# Altium PCB PCB1.PcbDoc (part 5 of 7)
Units mm, origin at the board's own origin, x right, y up, seen from the top; angles counter-clockwise.
Board outline 168 x 107.92 mm, 4 copper layers (Top Layer, POWER_LAYER, GND_LAYER, Bottom Layer), stack 1.182 mm thick; 507 components, 566 nets, 2495 pads, 1244 vias.
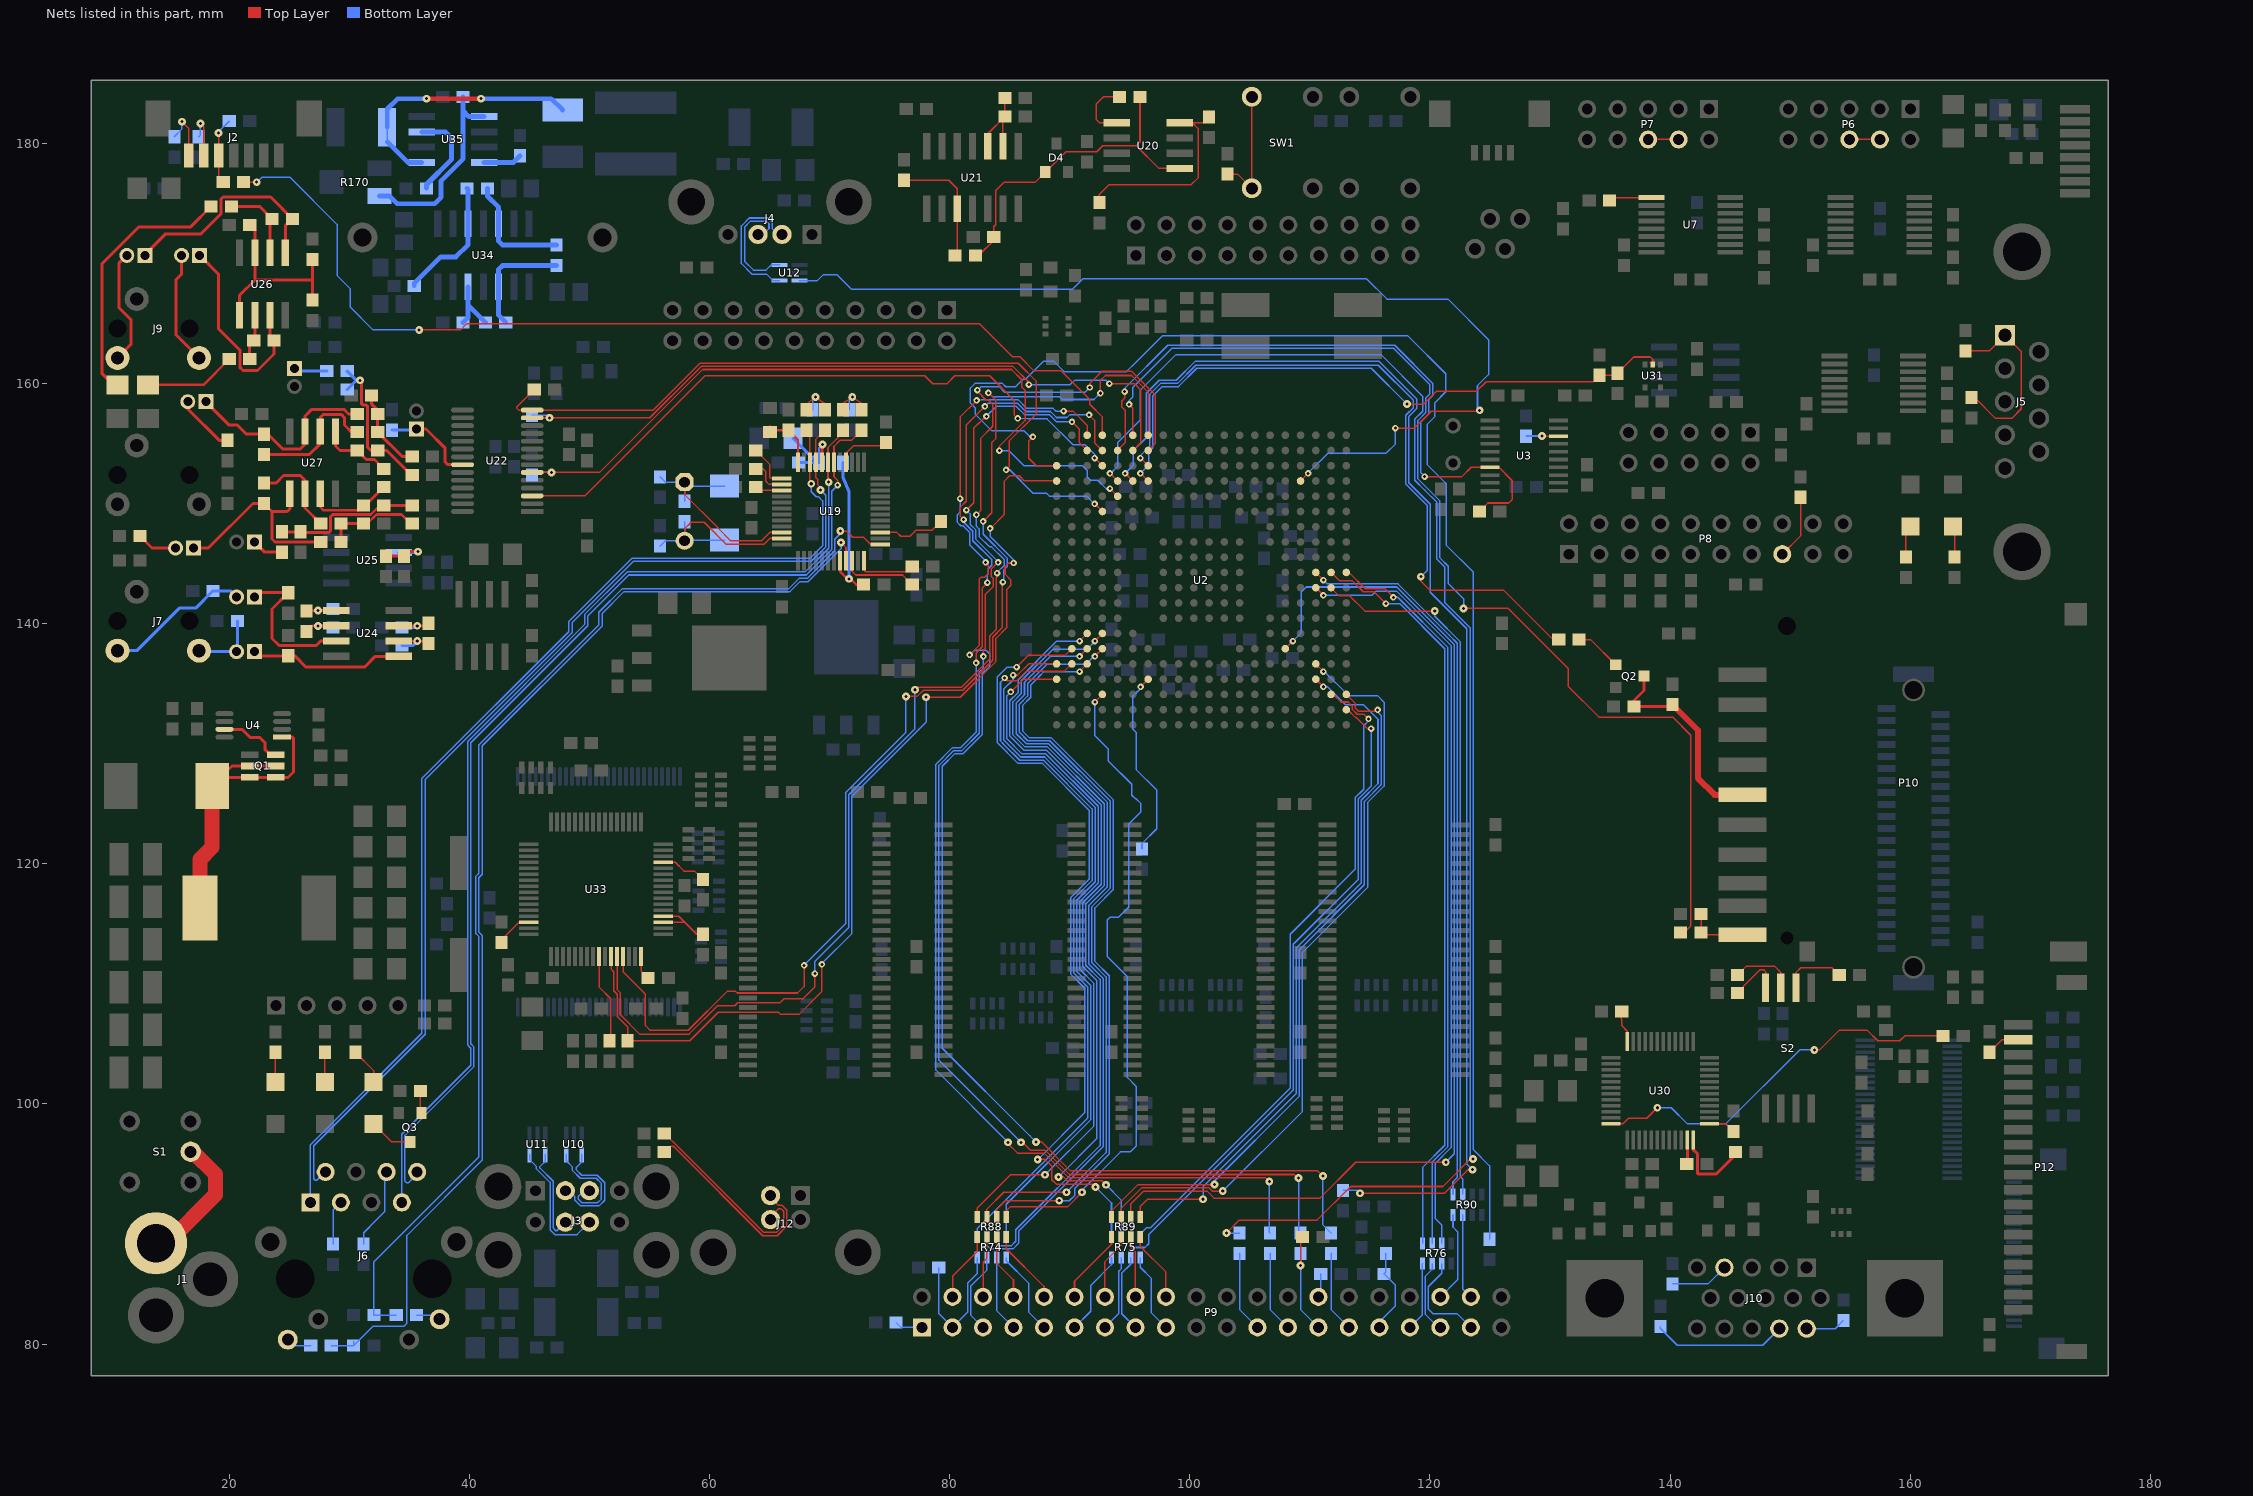
[diagram p7: the nets of this part, all layers, seen from the top]

## Via types
v1: diameter 0.54, hole 0.254, Top Layer to Bottom Layer, tented both sides, 504 vias
v2: diameter 0.65, hole 0.254, Top Layer to Bottom Layer, 387 vias
v3: diameter 0.65, hole 0.254, Top Layer to Bottom Layer, tented both sides, 325 vias
v4: diameter 0.54, hole 0.254, Top Layer to Bottom Layer, 25 vias
v5: diameter 1.27, hole 0.75, Top Layer to Bottom Layer, 2 vias
v6: diameter 0.65, hole 0.254, Top Layer to Bottom Layer, tented bottom, 1 vias

## Nets (pads, with @x,y where several pads share a name; then routed paths per layer and width w, separated by ;. In a path a pad name is that pad's centre, name@x,y a point inside that pad or via, vN(x,y) a via of type N, cw(c..) or ccw(c..) an arc to the next point about the centre after c; other vN are vias at no path point) (continued)
NetC130_2: C130.2 R47.2 U19.46 Y3.1 Y4.1 | length 18.3
  Top Layer w0.127: Y4.1@57.912,151.792 57.912,150.768 60.691,147.989 60.691,147.969 61.76,146.9 64.298,146.9 65,147.602 U19.46@66.004,147.602
  Bottom Layer w0.127: C130.2@55.88,152.234 56.322,151.792 Y4.1@57.912,151.792 ; R47.2@57.912,150.202 Y4.1@57.912,151.792 ; Y3.1@61.234,151.472 58.232,151.472 Y4.1@57.912,151.792
NetC132_2: C132.2 R47.1 U19.47 Y3.2 Y4.2 | length 17.4
  Top Layer w0.127: Y4.2@57.912,146.912 57.912,147.912 58.46,148.46 59.54,148.46 60.543,147.457 60.543,147.437 61.34,146.64 64.538,146.64 65,147.102 U19.47@66.004,147.102
  Bottom Layer w0.127: C132.2@55.88,146.47 56.322,146.912 Y4.2@57.912,146.912 ; R47.1@57.912,148.502 Y4.2@57.912,146.912 ; Y3.2@61.234,146.972 57.972,146.972 Y4.2@57.912,146.912
NetC134_2: C134.2 C137.2 L5.1 U19.32 | length 7.7
  Top Layer w0.127: v2@69.354,154.874 v2(69.4,154.92)
  Top Layer w0.25: U19.32@69.354,153.452 v2@69.354,154.874
  Bottom Layer w0.2: L5.1@69.104,153.416 69.104,154.624 v2(69.4,154.92)
  Bottom Layer w0.25: C134.2@66.932,155.448 L5.1@68.964,153.416 ; C137.2@67.398,153.416 L5.1@69.104,153.416
NetC135_2: C135.2 L5.2 U19.8 | length 13.1
  Top Layer w0.127: 70.854,144.346 U19.8@70.854,145.252 ; v2@71.469,143.731 v2@71.729,143.731 ; 72.204,143.256 C135.2@72.81,143.256
  Top Layer w0.2: 70.854,144.346 v2@71.469,143.732 ; v2@71.729,143.732 72.204,143.256
  Bottom Layer w0.25: L5.2@71.104,153.416 71.1,152.2 71.6,150.98 v2(71.6,143.74)
NetC136_2: C136.2 L4.1 U19.36 | length 4.7
  Top Layer w0.127: 65.024,156.48 L4.1@65.382,156.122
  Top Layer w0.2: L4.1@65.382,156.122 C136.2@66.548,156.122 67.354,155.316 U19.36@67.354,153.452
NetC139_2: C139.2 R52.1 R55.1 | length 4.2
  Top Layer w0.127: R52.1@71.12,157.822 71.12,158.36 v3(71.88,158.88) 72.644,158.356 R55.1@72.644,157.822
  Bottom Layer w0.127: C139.2@71.628,157.822 71.628,158.868 v3(71.88,158.88)
NetC140_2: C140.2 R53.2 R56.2 | length 4.1
  Top Layer w0.127: R53.2@68.072,157.822 68.072,158.312 v3(68.82,158.88) 69.596,158.324 R56.2@69.596,157.822
  Bottom Layer w0.127: C140.2@68.58,157.822 68.58,158.82 v3(68.82,158.88)
NetC141_2: C141.2 J6.6 | length 6.8
  Bottom Layer w0.127: C141.2@31.18,88.326 31.18,89.26 31.688,89.768 31.688,89.788 32.94,91.04 32.94,94.189 J6.6@33.085,94.334
NetC142_2: C142.2 J6.3 | length 3.7
  Bottom Layer w0.127: C142.2@28.64,88.326 28.64,91.159 J6.3@29.275,91.794
NetC143_1: C143.1 R84.1 U21.3 | length 10.3
  Top Layer w0.127: R84.1@76.2,176.95 79.91,176.95 80.618,176.242 80.618,170.876 C143.1@80.43,170.688
NetC143_2: C143.2 D4.1 R65.2 R78.2 U20.1 | length 28.1
  Top Layer w0.127: C143.2@82.13,170.688 82.408,170.688 83.654,171.934 83.654,173.074 83.82,173.24 83.82,176.08 84.5,176.76 87.094,176.76 D4.1@87.95,177.616 87.976,177.616 89.68,179.32 92.24,179.32 92.74,179.82 95.54,179.82 ; R78.2@95.846,183.896 95.846,180.126 95.54,179.82 ; U20.1@99.145,177.927 97.433,177.927 95.54,179.82
NetC144_2: C144.2 R87.1 U21.9 U21.10 | length 6.9
  Top Layer w0.127: U21.10@83.158,179.772 83.158,180.816 R87.1@84.594,182.252 C144.2@84.594,183.776 ; U21.9@84.428,179.772 R87.1@84.428,182.086
NetC145_2: C145.2 P10.4 Q2.3 R97.1 | length 17
  Top Layer w0.25: R97.1@136.994,133.096 140.042,133.096 C145.2@140.208,133.262 ; 136.994,133.604 137.827,134.437 Q2.3@137.827,135.636
  Top Layer w0.5: C145.2@140.208,133.262 142.32,131.15 142.32,127.14 143.713,125.747 P10.4@146.043,125.747
NetC147_1: C147.1 R104.2 U24.3 | length 13.1
  Top Layer w0.25: C147.1@22.086,142.24 22.428,142.582 R104.2@24.892,142.582 23.54,141.23 23.54,138.78 24.12,138.2 27.24,138.2 27.597,138.557 U24.3@28.896,138.557
NetC147_2: C147.2 J7.1 R100.1 | length 12.2
  Bottom Layer w0.25: J7.1@10.668,137.758 12.278,137.758 15.82,141.3 17.182,141.3 R100.1@18.63,142.748 20.078,142.748 C147.2@20.586,142.24
NetC148_1: C148.1 R105.1 U24.5 | length 12.9
  Top Layer w0.25: C148.1@22.086,137.668 22.428,137.326 25.434,137.326 26.38,136.38 31.24,136.38 32.147,137.287 U24.5@34.096,137.287
NetC148_2: C148.2 J7.2 R101.2 | length 5.7
  Bottom Layer w0.25: J7.2@17.468,137.758 17.558,137.668 C148.2@20.586,137.668 20.662,137.744 R101.2@20.662,140.208
NetC149_1: C149.1 R107.2 U24.2 | length 4
  Top Layer w0.2: C149.1@26.416,139.358 26.885,139.827 U24.2@28.896,139.827
  Bottom Layer w0.25: v2(27.38,139.82) 27.82,139.82 27.94,139.7 R107.2@28.614,139.7
NetC149_2: C149.2 R109.2 U24.1 | length 3.8
  Top Layer w0.2: C149.2@26.416,141.058 26.455,141.097 U24.1@28.896,141.097
  Bottom Layer w0.25: v2(27.36,141.1) 28.08,141.1 28.204,141.224 R109.2@28.614,141.224
NetC150_1: C150.1 R108.2 U24.6 | length 4
  Top Layer w0.2: U24.6@34.096,138.557 36.361,138.557 C150.1@36.576,138.342
  Bottom Layer w0.25: R108.2@34.378,138.176 35.259,138.176 v2(35.64,138.557)
NetC150_2: C150.2 R110.2 U24.7 | length 3.9
  Top Layer w0.2: U24.7@34.096,139.827 36.361,139.827 C150.2@36.576,140.042
  Bottom Layer w0.25: R110.2@34.378,139.7 35.513,139.7 v2(35.64,139.827)
NetC153_1: C153.1 C154.2 U25.2 | length 4.5
  Top Layer w0.25: C153.1@33.02,145.63 C154.2@34.544,145.63 34.914,146 v2(35.7,146)
  Bottom Layer w0.25: U25.2@34.096,145.923 35.623,145.923 v2(35.7,146)
NetC159_1: C159.1 C161.1 U22.22 | length 7.8
  Top Layer w0.25: C161.1@35.56,156.222 36.358,156.222 37.96,154.62 37.96,153.48 38.188,153.252 U22.22@39.412,153.252
  Bottom Layer w0.25: C159.1@33.528,156.122 35.46,156.122 C161.1@35.56,156.222
NetC163_1: C163.1 R115.2 | length 22
  Top Layer w0.2: C163.1@10.668,159.896 C163.1@10.736,159.896
  Top Layer w0.25: C163.1@10.668,159.896 10.324,159.896 9.36,160.86 9.36,169.96 12.46,173.06 16.762,173.06 R115.2@18.454,174.752
NetC164_1: C164.1 R116.2 | length 7.7
  Top Layer w0.2: C164.1@13.208,159.896 17.822,159.896 R116.2@19.978,162.052
NetC167_1: C167.1 R111.1 R120.2 R121.2 | length 8.1
  Top Layer w0.2: C167.1@31.154,148.336 31.476,148.336 32.24,149.1 32.275,149.1
  Top Layer w0.25: R120.2@29.298,146.812 R121.2@29.298,148.336 C167.1@31.154,148.336 ; 32.275,149.1 34.32,149.1 35.084,148.336 R111.1@35.218,148.336
NetC168_1: C168.1 R113.1 R123.2 R124.2 | length 7
  Top Layer w0.25: C168.1@31.838,159.004 31.838,158.295 32.346,157.787 R124.2@32.346,155.956 34.378,153.924 R113.1@35.218,153.924
NetC169_1: C169.1 R117.1 | length 2.7
  Top Layer w0.25: C169.1@22.086,146.812 22.936,145.962 R117.1@24.384,145.962
NetC170_1: C170.1 R118.1 | length 2.8
  Bottom Layer w0.25: C170.1@25.4,161.278 25.642,161.036 R118.1@28.106,161.036
NetC171_2: C171.2 R112.1 R117.2 R122.2 | length 12.5
  Top Layer w0.2: 31.73,149.08 31.758,149.08 32.538,149.86 R122.2@32.854,149.86
  Top Layer w0.25: R117.2@24.384,147.662 C171.2@25.908,147.662 25.99,147.58 28.26,147.58 28.42,147.74 28.42,148.92 28.588,149.088 31.73,149.088 ; R122.2@32.854,149.86 R112.1@35.218,149.86
NetC172_2: C172.2 R114.1 R118.2 R125.2 | length 13.1
  Top Layer w0.25: v2(30.86,160.28) 30.98,160.16 30.98,158.36 31.1,158.24 31.36,158.24 31.48,158.12 31.48,154.72 31.768,154.432 33.108,154.432 35.14,152.4 R114.1@35.218,152.4
  Bottom Layer w0.25: C172.2@29.806,159.512 30.574,160.28 v2(30.86,160.28) ; R118.2@29.806,161.036 v2@30.562,160.28
NetC174_1: C174.1 R121.1 U27.2 | length 8
  Top Layer w0.25: C174.1@22.86,151.726 23.886,151.726 24.5,152.34 25.9,152.34 26.289,151.951 26.289,149.645 R121.1@27.598,148.336
NetC174_2: C174.2 C179.1 R120.1 U27.1 | length 17.6
  Top Layer w0.25: C179.1@17.006,146.304 18.224,146.304 21.946,150.026 C174.2@22.86,150.026 23.54,149.346 ; U27.1@25.019,150.816 25.019,149.559 24.806,149.346 23.54,149.346 ; R120.1@27.598,146.812 23.788,146.812 23.54,147.06 23.54,149.346
NetC175_2: C175.2 R122.1 U27.3 | length 7.5
  Top Layer w0.2: U27.3@27.559,149.721 27.84,149.44 30.734,149.44 R122.1@31.154,149.86 R122.1@31.24,149.86 ; C175.2@32.764,151.384 C175.2@32.854,151.384
  Top Layer w0.25: U27.3@27.559,149.721 U27.3@27.559,150.816 ; R122.1@31.154,149.86 31.33,149.86 C175.2@32.854,151.384
NetC176_1: C176.1 R124.1 U27.6 | length 11.4
  Top Layer w0.25: C176.1@22.86,154.09 26.65,154.09 27.559,154.999 27.559,157.179 27.82,157.44 29.3,157.44 29.58,157.16 29.58,156.56 30.184,155.956 R124.1@30.646,155.956
NetC176_2: C176.2 C180.1 R123.1 U27.7 | length 22.3
  Top Layer w0.2: C176.2@22.86,155.79 23.21,155.79 24.46,154.54 25.88,154.54 26.289,154.949 U27.7@26.289,156.016
  Top Layer w0.25: C180.1@18.022,158.496 19.978,156.54 20.66,156.54 21.41,155.79 23.21,155.79 24.46,154.54 25.88,154.54 26.289,154.949 26.289,157.289 26.86,157.86 29.54,157.86 29.92,157.48 R123.1@30.646,157.48
NetC177_2: C177.2 R125.1 U27.5 | length 6
  Top Layer w0.25: U27.5@28.829,156.016 28.829,154.811 29.208,154.432 R125.1@30.646,154.432 31.398,153.68 32.082,153.68 C177.2@32.854,152.908
NetC178_2: C178.2 R126.2 R127.2 U26.3 U26.5 | length 16.4
  Top Layer w0.25: U26.5@20.84,165.69 20.84,167.36 22.12,168.64 26.924,168.64 ; R127.2@21.678,173.228 22.11,172.796 22.11,168.63 ; R126.2@26.924,166.966 C178.2@26.924,170.346
NetC179_2: C179.2 R129.2 | length 3.4
  Top Layer w0.25: R129.2@12.534,147.32 13.55,146.304 C179.2@15.506,146.304
NetC180_2: C180.2 R130.2 | length 5
  Top Layer w0.25: C180.2@16.522,158.496 16.522,157.898 19.138,155.282 R130.2@19.812,155.282
NetC181_1: C181.1 R128.1 U26.1 | length 18.9
  Top Layer w0.25: C181.1@12.942,170.688 12.942,170.742 14.68,172.48 17.62,172.48 19.28,174.14 19.28,175.36 19.46,175.54 23.43,175.54 R128.1@25.234,173.736 24.65,173.152 U26.1@24.65,170.89
NetC181_2: C181.2 J9.1 | length 9.7
  Top Layer w0.25: J9.1@10.668,162.142 11.78,163.254 11.78,165.34 10.78,166.34 10.78,170.026 C181.2@11.442,170.688
NetC182_1: C182.1 R119.2 U26.7 | length 17.6
  Top Layer w0.25: C182.1@17.514,170.688 19.1,169.102 19.1,164.56 20.86,162.8 20.86,161.36 21.12,161.1 22.34,161.1 23.71,162.47 R119.2@23.71,163.576 23.38,163.906 U26.7@23.38,165.69
NetC182_2: C182.2 J9.2 | length 9.5
  Top Layer w0.25: C182.2@16.014,170.688 16.014,169.134 15.54,168.66 15.54,164.07 J9.2@17.468,162.142
NetC201_2: C201.2 U30.36 | length 7
  Top Layer w0.25: U30.36@141.942,96.992 141.942,96.178 142.28,95.84 142.28,94.22 142.34,94.16 143.84,94.16 145.454,95.774 C201.2@145.454,96.012
NetC205_2: C205.2 U30.35 | length 2
  Top Layer w0.25: C205.2@141.39,94.996 141.442,95.048 U30.35@141.442,96.992
NetC224_2: C224.2 U35.3 | length 7.8
  Bottom Layer w0.4: U35.3@36.008,180.975 37.985,180.975 38.5,180.46 38.5,178.68 36.41,176.59 C224.2@36.41,176.276
NetD1_1: D1.1 R4.1 | length 2.6
  Top Layer w0.127: D1.1@163.576,148.11 163.716,147.97 R4.1@163.716,145.558
NetD2_1: D2.1 R6.1 | length 2.4
  Top Layer w0.127: R6.1@159.652,145.558 159.652,147.812 D2.1@159.772,147.932
NetD3_2: D3.2 L3.1 Q1.1 Q1.2 Q1.5 Q1.6 U4.1 | length 26.6
  Top Layer w0.25: D3.2@18.542,126.492 20.2,128.15 Q1.2@23.844,128.15 ; D3.2@19.25,127.2 24.88,127.2 25.32,127.64 25.32,130.48 25.244,130.556 U4.1@24.384,130.556
  Top Layer w1.27: L3.1@17.532,116.332 17.532,120.372 18.542,121.382 D3.2@18.542,126.492
NetD5_1: D5.1 R94.1 | length 2.5
  Top Layer w0.127: D5.1@23.828,101.822 R94.1@23.828,104.302
NetD6_1: D6.1 R96.1 | length 2.5
  Top Layer w0.127: D6.1@27.94,101.826 R96.1@27.94,104.306
NetD7_1: D7.1 R98.1 | length 3.1
  Top Layer w0.127: R98.1@30.48,104.306 32.004,102.782 D7.1@32.004,101.826
NetD7_2: D7.2 Q3.3 | length 3.7
  Top Layer w0.127: D7.2@32.004,98.326 33.486,96.844 Q3.3@35.052,96.844
NetD11_1: D11.1 L10.2 U35.1 | length 21.7
  Top Layer w0.4: v2(36.42,183.74) v2(40.94,183.74)
  Bottom Layer w0.127: L10.2@33.138,180.142 L10.2@33.138,181.356
  Bottom Layer w0.4: L10.2@33.138,180.142 34.845,178.435 U35.1@36.008,178.435 ; L10.2@33.138,181.356 33.138,182.878 34,183.74 v2(36.42,183.74) ; v2(40.94,183.74) 46.8,183.74 47.742,182.798 D11.1@47.752,182.798
NetJ1_1: J1.1 S1.2 | length 11.2
  Top Layer w1.27: J1.1@13.876,88.392 14.792,88.392 18.84,92.44 18.84,94.14 16.968,96.012 S1.2@16.764,96.012
NetJ2_5: J2.5 R28.1 R33.1 | length 6.4
  Top Layer w0.127: v3(19.092,180.88) 19.092,176.406 R28.1@19.47,176.784
  Bottom Layer w0.127: v3(19.092,180.88) 19.092,180.978 R33.1@19.978,181.864
NetJ2_6: J2.6 R29.1 | length 3.9
  Top Layer w0.127: v3(17.58,181.66) 17.842,181.418 J2.6@17.842,178.988
  Bottom Layer w0.127: R29.1@17.432,180.562 17.58,180.71 v3(17.58,181.66)
NetJ2_7: J2.7 R30.1 | length 4.6
  Top Layer w0.127: v3(16.04,181.82) 16.592,181.268 J2.7@16.592,178.988
  Bottom Layer w0.127: R30.1@15.4,180.562 16.04,181.202 v3(16.04,181.82)
NetJ3_2: J3.2 U10.4 | length 9.9
  Bottom Layer w0.127: J3.2@47.976,92.77 48.29,92.77 48.766,92.294 48.766,91.98 48.78,91.98 49.26,91.5 50.78,91.5 51.26,91.98 51.26,93.439 51.22,93.479 50.64,94.06 49.34,94.06 48.9,94.5 48.9,94.72 49.342,95.162 U10.4@49.342,95.797
NetJ3_3: J3.3 U10.5 | length 9.2
  Bottom Layer w0.127: U10.5@48.042,95.797 48.042,95.258 48.56,94.74 48.56,94.46 49.22,93.8 50.54,93.8 50.98,93.36 50.98,92.08 50.66,91.76 49.36,91.76 49.06,92.06 49.06,92.3 49.53,92.77 J3.3@49.976,92.77
NetJ3_6: J3.6 U11.4 | length 8.2
  Bottom Layer w0.127: U11.4@46.294,95.797 46.294,95.214 45.86,94.78 45.86,94.66 46.96,93.56 46.96,89.66 47.18,89.44 47.266,89.44 J3.6@47.976,90.15
NetJ3_7: J3.7 U11.5 | length 10.9
  Bottom Layer w0.127: U11.5@44.994,95.797 44.994,95.366 45.54,94.82 45.54,94.62 46.706,93.454 46.706,89.514 47.1,89.12 48.946,89.12 J3.7@49.976,90.15
NetJ4_2: J4.2 U12.4 | length 11.4
  Bottom Layer w0.127: U12.4@65.825,168.59 65.27,168.59 64.73,169.13 63.51,169.13 62.64,170 62.64,173.14 63.3,173.8 64.82,173.8 65.2,173.42 65.2,172.92 65.69,172.43 J4.2@66.024,172.43
NetJ4_3: J4.3 U12.5 | length 10.1
  Bottom Layer w0.127: J4.3@64.024,172.43 64.45,172.43 64.94,172.92 64.94,173.32 64.72,173.54 63.4,173.54 62.92,173.06 62.92,170.18 63.64,169.46 64.7,169.46 65.13,169.89 U12.5@65.825,169.89
NetJ5_1: J5.1 R43.1 R44.1 | length 15.8
  Top Layer w0.127: R43.1@164.592,162.726 166.586,162.726 J5.1@167.896,164.036 169.26,162.672 169.26,157.9 168.46,157.1 167.12,157.1 165.382,158.838 R44.1@165.1,158.838
NetJ6_1: J6.1 R53.1 U19.34 | length 91.6
  Top Layer w0.127: R53.1@68.072,156.122 68.354,155.84 68.354,151.766 v3(68.46,151.66) v3@68.7,151.66
  Bottom Layer w0.127: J6.1@26.735,91.794 26.735,96.595 36.019,105.879 36.019,127.097 48.26,139.337 48.26,140.18 53.534,145.454 68.356,145.454 69.404,146.502 69.404,150.236 69.06,150.58 68.88,150.58 68.46,151 v3(68.46,151.66)
NetJ6_2: J6.2 R56.1 U19.33 | length 90.7
  Top Layer w0.127: v3(69.22,151.14) 69.22,151.36 69.02,151.56 69.02,152 68.854,152.166 68.854,155.38 R56.1@69.596,156.122
  Bottom Layer w0.127: J6.2@28.005,94.334 27.954,94.334 27.26,93.64 27.14,93.64 27.02,93.76 27.02,96.52 36.3,105.8 36.3,127.018 48.54,139.258 48.54,140.08 53.66,145.2 68.462,145.2 69.658,146.396 69.658,150.702 v3(69.22,151.14)
NetJ6_7: J6.7 R52.2 U19.31 | length 88.6
  Top Layer w0.127: v3(69.912,151.792) 69.854,151.85 69.854,154.676 71.12,155.942 R52.2@71.12,156.122
  Bottom Layer w0.127: J6.7@34.355,91.794 34.355,97.474 40.1,103.219 40.1,104.64 39.84,104.9 39.84,130.199 49.58,139.939 49.58,140.76 53.134,144.314 67.935,144.314 69.912,146.291 v3(69.912,151.792) v3@69.98,151.86
NetJ6_8: J6.8 R55.2 U19.30 | length 89.6
  Top Layer w0.127: v1(70.66,151.54) 70.66,151.94 70.354,152.246 70.354,154.774 70.88,155.3 71.84,155.3 72.058,155.518 72.058,155.536 R55.2@72.644,156.122 ; 71.782,155.26 71.822,155.3
  Bottom Layer w0.127: J6.8@35.625,94.334 35.625,94.145 34.92,93.44 34.735,93.44 34.609,93.566 34.609,97.369 40.36,103.12 40.36,104.739 40.094,105.005 40.094,130.094 49.84,139.84 49.84,140.64 53.26,144.06 68.04,144.06 70.166,146.186 70.166,151.046 v1(70.66,151.54)
NetJ6_9: J6.9 R59.2 | length 2.1
  Bottom Layer w0.127: J6.9@24.855,80.364 25.363,79.856 R59.2@26.774,79.856
NetJ6_12: J6.12 R60.2 | length 2.1
  Bottom Layer w0.127: R60.2@35.586,82.396 37.174,82.396 J6.12@37.505,82.066
NetJ10_4: J10.4 R133.2 | length 4.9
  Bottom Layer w0.127: R133.2@140.208,85.002 143.168,85.002 J10.4@144.526,86.36
NetJ10_11: J10.11 R135.2 | length 3.3
  Bottom Layer w0.127: J10.11@151.384,81.28 153.758,81.28 R135.2@154.432,81.954
NetJ10_12: J10.12 R134.2 | length 11.2
  Bottom Layer w0.127: R134.2@139.192,81.446 139.192,81.308 140.6,79.9 147.718,79.9 J10.12@149.098,81.28
NetJ12_2: J12.2 R161.1 | length 16.4
  Top Layer w0.127: R161.1@56.72,96.42 56.78,96.48 56.96,96.48 57.184,96.256 64.42,89.02 65.62,89.02 66.42,89.82 66.42,91.16 66.04,91.54 65.74,91.54 65.07,92.21 J12.2@65.07,92.36
NetJ12_3: J12.3 R162.1 | length 16.4
  Top Layer w0.127: R162.1@56.222,97.536 56.244,97.536 56.91,96.87 56.93,96.87 57.279,96.52 64.499,89.3 65.54,89.3 66.16,89.92 66.16,91.06 65.94,91.28 65.76,91.28 65.07,90.59 J12.3@65.07,90.36
NetP6_4: P6.4 P6.6 | length 2.5
  Top Layer w0.127: P6.6@154.94,180.34 P6.4@157.48,180.34
NetP7_4: P7.4 P7.6 | length 2.5
  Top Layer w0.127: P7.6@138.176,180.34 P7.4@140.716,180.34
NetP8_15: P8.15 R40.1 | length 5.4
  Top Layer w0.127: P8.15@149.352,145.796 150.876,147.32 R40.1@150.876,150.534
NetP9_1: P9.1 R82.1 | length 2.3
  Bottom Layer w0.127: R82.1@75.526,81.788 75.93,81.384 P9.1@77.688,81.384
NetP9_3: P9.3 R74.8 R83.1 | length 12.1
  Bottom Layer w0.127: R83.1@79.082,86.36 79.082,82.53 P9.3@80.228,81.384 81.48,82.636 81.48,85.06 82.296,85.876 R74.8@82.296,87.2
NetP9_4: P9.4 R88.1 | length 5.8
  Top Layer w0.127: P9.4@80.228,83.924 80.228,85.648 82.296,87.716 R88.1@82.296,88.9
NetP9_5: P9.5 R74.7 | length 6.8
  Bottom Layer w0.127: P9.5@82.768,81.384 81.734,82.418 81.734,84.814 83.096,86.176 R74.7@83.096,87.2
NetP9_6: P9.6 R88.2 | length 5.1
  Top Layer w0.127: P9.6@82.768,83.924 82.768,86.808 83.096,87.136 R88.2@83.096,88.9
NetP9_7: P9.7 R74.6 | length 6.4
  Bottom Layer w0.127: R74.6@83.896,87.2 83.896,82.796 P9.7@85.308,81.384
NetP9_8: P9.8 R88.3 | length 5.6
  Top Layer w0.127: R88.3@83.896,88.9 83.896,86.744 85.308,85.332 P9.8@85.308,83.924
NetP9_9: P9.9 R74.5 | length 7.1
  Bottom Layer w0.127: R74.5@84.696,87.2 84.696,86.944 86.56,85.08 86.56,82.672 P9.9@87.848,81.384
NetP9_10: P9.10 R88.4 | length 6.3
  Top Layer w0.127: R88.4@84.696,88.9 84.696,87.944 87.848,84.792 P9.10@87.848,83.924
NetP9_11: P9.11 R75.8 | length 7.1
  Bottom Layer w0.127: P9.11@90.388,81.384 91.74,82.736 91.74,84.88 93.472,86.612 R75.8@93.472,87.2
NetP9_12: P9.12 R89.1 | length 6.3
  Top Layer w0.127: P9.12@90.388,83.924 90.388,85.228 93.472,88.312 R89.1@93.472,88.9
NetP9_13: P9.13 R75.7 | length 6.4
  Bottom Layer w0.127: P9.13@92.928,81.384 94.08,82.536 94.08,86.06 94.272,86.252 R75.7@94.272,87.2
NetP9_14: P9.14 R89.2 | length 5.5
  Top Layer w0.127: P9.14@92.928,83.924 92.928,86.868 94.272,88.212 R89.2@94.272,88.9
NetP9_15: P9.15 R75.6 | length 6.6
  Bottom Layer w0.127: R75.6@95.072,87.2 95.072,86.652 94.334,85.914 94.334,82.518 P9.15@95.468,81.384
NetP9_16: P9.16 R89.3 | length 5.1
  Top Layer w0.127: R89.3@95.072,88.9 95.072,88.108 95.468,87.712 P9.16@95.468,83.924
NetP9_17: P9.17 R75.5 | length 6.7
  Bottom Layer w0.127: R75.5@95.872,87.2 95.872,86.388 96.8,85.46 96.8,82.592 P9.17@98.008,81.384
NetP9_18: P9.18 R89.4 | length 5.9
  Top Layer w0.127: R89.4@95.872,88.9 95.872,88.128 98.008,85.992 P9.18@98.008,83.924
NetP9_23: P9.23 R67.2 | length 6.8
  Bottom Layer w0.127: R67.2@104.14,87.542 104.14,82.872 P9.23@105.628,81.384
NetP9_25: P9.25 R68.2 | length 6.8
  Bottom Layer w0.127: R68.2@106.68,87.542 106.68,82.872 P9.25@108.168,81.384
NetP9_27: P9.27 R69.2 R77.1 | length 9.2
  Top Layer w0.127: v3(109.22,86.54) 109.22,88.734 R77.1@109.386,88.9
  Bottom Layer w0.127: R69.2@109.22,87.542 109.22,82.872 P9.27@110.708,81.384
NetP9_28: P9.28 R85.2 | length 2
  Bottom Layer w0.127: P9.28@110.708,83.924 110.91,84.126 R85.2@110.91,85.852
NetP9_29: P9.29 R70.2 | length 6.8
  Bottom Layer w0.127: R70.2@111.76,87.542 111.76,82.872 P9.29@113.248,81.384
NetP9_31: P9.31 R71.2 R81.2 | length 7.2
  Bottom Layer w0.127: P9.31@115.788,81.384 115.788,81.848 117.1,83.16 117.1,84.918 R81.2@116.166,85.852 116.332,86.018 R71.2@116.332,87.542
NetP9_33: P9.33 R76.8 | length 5.7
  Bottom Layer w0.127: P9.33@118.328,81.384 119.34,82.396 119.34,86.652 R76.8@119.38,86.692
NetP9_35: P9.35 R76.7 | length 6.2
  Bottom Layer w0.127: R76.7@120.18,86.692 120.18,86.2 119.594,85.614 119.594,82.506 120.716,81.384 P9.35@120.868,81.384
NetP9_36: P9.36 R90.8 | length 7.6
  Bottom Layer w0.127: P9.36@120.868,83.924 122.3,85.356 122.3,89.36 121.92,89.74 R90.8@121.92,90.756
NetP9_37: P9.37 R76.6 | length 8.4
  Bottom Layer w0.127: R76.6@120.98,86.692 120.98,85.9 119.848,84.768 119.848,82.926 120.234,82.54 122.252,82.54 P9.37@123.408,81.384
NetP9_38: P9.38 R90.7 | length 7.1
  Bottom Layer w0.127: R90.7@122.72,90.756 122.72,84.612 P9.38@123.408,83.924
NetP10_10: P10.10 R92.1 R95.2 | length 5.1
  Top Layer w0.127: R95.2@142.582,115.824 R92.1@142.582,114.3 142.785,114.097 P10.10@146.043,114.097
NetP12_19: P12.19 R136.1 | length 2.8
  Top Layer w0.127: R136.1@166.624,104.306 167.678,105.36 P12.19@169.013,105.36
NetQ1_3: Q1.3 U4.7 | length 5.5
  Top Layer w0.25: U4.7@19.584,131.206 21.034,131.206 21.72,130.52 22.52,130.52 22.94,130.1 22.94,129.54 23.38,129.1 Q1.3@23.844,129.1
NetQ2_1: Q2.1 R91.1 | length 3.9
  Top Layer w0.127: R91.1@132.422,138.684 133.379,138.684 Q2.1@135.477,136.586
NetQ3_1: Q3.1 R99.1 | length 1.9
  Top Layer w0.127: R99.1@35.902,101.092 35.902,99.344 Q3.1@36.002,99.244
NetR5_1: R5.1 U2.G4 | length 16
  Top Layer w0.127: v1(95.89,134.744) 95.89,134.752 U2.G4@96.52,135.382
  Bottom Layer w0.127: v1(95.89,134.744) 95.89,134.59 95.669,134.369 95.649,134.369 95.26,133.98 95.26,131.22 95.52,130.96 95.52,127.86 97.24,126.14 97.24,122.92 96.012,121.692 R5.1@96.012,121.246
NetR12_2: R12.2 U2.E19 U3.7 | length 55.2
  Top Layer w0.127: U2.E19@93.98,154.432 93.98,154.46 94.62,155.1 94.62,157.76 94.32,158.06 94.32,158.54 94.56,158.78 v1(94.56,159.34) ; v1(119.56,152.26) 122.66,152.26 123.432,153.032 125.748,153.032 126.86,151.92 126.86,150.36 126.559,150.059 124.825,150.059 R12.2@124.118,149.352
  Bottom Layer w0.127: v1(94.56,159.34) 94.56,159.6 98.16,163.2 117.06,163.2 120.24,160.02 120.24,159.04 119.908,158.708 119.908,157.48 119.25,156.822 119.25,152.57 v1(119.56,152.26)
NetR13_1: R13.1 U3.18 | length 2.7
  Top Layer w0.127: v3(129.34,155.64) U3.18@130.708,155.632
  Bottom Layer w0.127: R13.1@128.016,155.614 128.042,155.64 v3(129.34,155.64)
NetR28_2: R28.2 U2.D20 | length 85.6
  Top Layer w0.127: R28.2@21.17,176.784 v3(22.26,176.78) ; v3(35.8,164.48) 39.24,164.48 39.76,165 82.46,165 85.2,162.26 85.82,162.26 87.02,161.06 89.28,161.06 91.66,158.68 91.66,158.28 92.71,157.23 U2.D20@92.71,155.702
  Bottom Layer w0.127: v3(22.26,176.78) 22.726,177.206 25.015,177.206 28.96,173.261 28.96,169.001 30.074,167.887 30.074,166.366 31.96,164.48 v3(35.8,164.48)
NetR35_1: R35.1 U7.9 | length 3.6
  Top Layer w0.127: R35.1@134.962,175.26 135.205,175.503 U7.9@138.457,175.503
NetR48_2: R48.2 U19.37 | length 3.8
  Top Layer w0.127: R48.2@63.842,154.432 65.02,153.254 65.02,152.18 65.098,152.102 U19.37@66.004,152.102
NetR49_2: R49.2 U19.38 | length 3.2
  Top Layer w0.127: R49.2@63.842,152.908 64.432,152.908 64.66,152.68 64.66,151.88 64.938,151.602 U19.38@66.004,151.602
NetR50_2: R50.2 U19.39 | length 2.3
  Top Layer w0.127: R50.2@63.842,151.384 64.124,151.102 U19.39@66.004,151.102
NetR51_1: R51.1 U19.28 | length 4.5
  Top Layer w0.127: U19.28@71.354,153.452 71.354,154.2 71.974,154.82 74.36,154.82 R51.1@74.676,155.136
NetR54_1: R54.1 U19.10 | length 6.6
  Top Layer w0.127: U19.10@71.854,145.252 71.854,144.366 72.16,144.06 76.06,144.06 R54.1@77.02,143.1
NetR57_1: R57.1 U19.12 | length 5.4
  Top Layer w0.127: U19.12@72.854,145.252 72.854,144.446 72.986,144.314 R57.1@77.424,144.314
NetR58_1: R58.1 U19.15 | length 5.7
  Top Layer w0.127: U19.15@74.204,147.602 75.598,147.602 75.907,147.293 76.693,147.293 77.2,147.8 78.536,147.8 R58.1@79.248,148.512
NetR59_1: R59.1 R61.1 U19.9 | length 97.9
  Top Layer w0.127: v3(70.94,146.76) 71.354,146.346 U19.9@71.354,145.252
  Bottom Layer w0.127: R59.1@28.474,79.856 R61.1@30.33,79.856 ; R61.1@30.33,80.23 R61.1@30.33,79.856 ; v3(70.94,146.76) 70.94,146.24 68.208,143.508 67.528,143.508 66.7,142.68 52.86,142.68 51.04,140.86 51.04,139.82 41.06,129.84 41.06,119.14 40.754,118.834 40.754,114.325 41.06,114.019 41.06,95.32 34.78,89.04 34.78,81.72 34.54,81.48 31.954,81.48 R61.1@30.33,79.856
NetR60_1: R60.1 R62.1 U19.13 | length 95.8
  Top Layer w0.127: v3(70.88,147.72) 71.4,147.72 71.92,147.2 72.82,147.2 73.418,146.602 U19.13@74.204,146.602
  Bottom Layer w0.127: R60.1@33.886,82.396 R62.1@32.03,82.396 32.03,86.85 40.78,95.6 40.78,113.94 40.5,114.22 40.5,118.94 40.78,119.22 40.78,129.919 50.76,139.899 50.76,140.96 52.734,142.934 66.595,142.934 67.441,143.78 68.121,143.78 70.42,146.079 70.42,147.04 70.88,147.5 v3(70.88,147.72)
NetR63_1: R63.1 R64.2 U20.4 | length 16.9
  Top Layer w0.127: R63.1@92.456,175.094 92.456,175.756 93.28,176.58 100.12,176.58 100.68,177.14 100.68,181.26 U20.4@100.203,181.737 ; U20.4@99.145,181.737 101.131,181.737 R64.2@101.6,182.206
NetR66_1: R66.1 U2.F17 | length 111.6
  Top Layer w0.127: v1(94.61,152.53) 95.248,151.892 U2.F17@95.25,151.892 ; v3(114.18,92.56) 121.2,92.56 123.16,94.52 v3(123.54,94.52)
  Bottom Layer w0.127: v1(94.61,152.53) 95.28,153.2 95.28,154.42 96.36,155.5 96.36,159.2 97.44,160.28 98.862,160.28 100.462,161.88 115.74,161.88 118.88,158.74 118.88,157.901 118.234,157.255 118.234,151.745 120.02,149.959 120.02,142.619 123.06,139.579 123.06,95 v3(123.54,94.52) ; R66.1@112.776,92.798 113.942,92.798 v3(114.18,92.56)
NetR67_1: R67.1 U2.E17 | length 125.1
  Top Layer w0.127: v1(93.34,152.53) 93.978,151.892 U2.E17@93.98,151.892 ; v3(103.04,89.24) 104.12,90.32 110.6,90.32 113.4,93.12 121.08,93.12 123.36,95.4 v3(123.58,95.4)
  Bottom Layer w0.127: v1(93.34,152.53) 93.41,152.53 93.98,153.1 93.98,155.08 95.852,156.952 95.852,159.432 98.84,162.42 115.92,162.42 119.4,158.94 119.4,157.702 118.742,157.044 118.742,151.956 119.589,151.108 120.577,150.121 120.577,145.381 121.224,144.734 121.224,141.775 123.34,139.658 123.34,95.64 v3(123.58,95.4) ; v3(103.04,89.24) 103.042,89.242 R67.1@104.14,89.242
NetR68_1: R68.1 U2.D19 | length 108.4
  Top Layer w0.127: v1(81.16,148.68) 80.86,148.98 80.86,149.68 81.38,150.2 81.38,156.56 v1(82.92,158.1) ; v1(82.2,136.74) 82.2,137.581 82.7,138.081 82.7,142.98 v1(83.14,143.42) ; v3(84.86,96.8) 84.86,96.68 85.64,95.9 87.841,95.9 89.881,93.86 106.3,93.86 v3(106.62,93.54) ; v1(91.6,157.4) 92.06,156.94 ; 92.08,156.94 92.08,155.06 92.708,154.432 U2.D19@92.71,154.432
  Bottom Layer w0.127: v1(81.16,148.68) 81.16,148.459 81.92,147.699 81.92,146.92 83.5,145.34 83.5,144.88 83.2,144.58 83.2,144.16 83.14,144.1 v1(83.14,143.42) ; v1(82.2,136.74) 82.2,130.98 80.908,129.688 80.228,129.688 78.84,128.3 78.84,102.82 v3(84.86,96.8) ; v1(82.92,158.1) 83.2,158.38 85.62,158.38 86.32,157.68 88.379,157.68 88.879,157.18 89.76,157.18 89.98,157.4 v1(91.6,157.4) ; v3(106.62,93.54) 106.62,89.302 R68.1@106.68,89.242
NetR69_1: R69.1 U2.C19 | length 107.6
  Top Layer w0.127: v1(81.38,149.46) 82,150.08 82,156.3 v1(83.04,157.28) ; v1(82.8,137.28) 82.8,137.822 82.96,137.982 82.96,142.44 83.62,143.1 83.62,143.78 83.46,143.94 83.46,144.56 v1(84.02,145.12) ; v3(85.94,96.8) 86.06,96.8 86.7,96.16 87.94,96.16 89.98,94.12 108.7,94.12 v3(109.06,93.82) ; v1(90.18,156.82) 90.8,156.2 90.8,155.08 91.44,154.44 U2.C19@91.44,154.432
  Bottom Layer w0.127: v1(81.38,149.46) 81.694,149.146 81.694,148.285 82.18,147.799 82.18,147.019 84.02,145.179 v1(84.02,145.12) ; v1(82.8,137.28) 82.8,136.32 82.454,135.974 82.454,130.875 81.013,129.434 80.334,129.434 79.1,128.2 79.1,103.64 v3(85.94,96.8) ; v1(83.04,157.28) 83.88,158.12 85.52,158.12 86.22,157.42 88.28,157.42 88.88,156.82 v1(90.18,156.82) ; v3(109.06,93.82) 109.06,89.402 R69.1@109.22,89.242
NetR70_1: R70.1 U2.C20 | length 112.7
  Top Layer w0.127: v1(80.86,150.42) 80.86,157.22 v1(82.24,158.6) ; v1(81.66,137.4) 82.44,138.18 82.44,143.72 82.6,143.88 82.9,143.88 83.2,144.18 83.2,144.9 v1(82.98,145.12) ; v3(87.18,96.84) 87.631,96.84 90.051,94.42 110.66,94.42 v3(111.08,94) ; v1(89.48,157.72) 90.26,157.72 91.44,156.54 U2.C20@91.44,155.702
  Bottom Layer w0.127: v1(80.86,150.42) 80.86,149.3 80.633,149.073 80.633,148.44 80.904,148.169 81.09,148.169 81.66,147.599 81.66,146.56 82.98,145.24 v1(82.98,145.12) ; v1(81.66,137.4) 82.06,137.8 83.02,137.8 83.32,137.5 83.32,136.446 82.708,135.834 82.708,130.769 81.119,129.18 80.44,129.18 79.38,128.12 79.38,104.64 86.693,97.327 v3(87.18,96.84) ; v1(82.24,158.6) 82.62,158.64 85.719,158.64 86.419,157.94 88.6,157.94 88.82,157.72 v1(89.48,157.72) ; v3(111.08,94) 111.08,89.922 R70.1@111.76,89.242
NetR72_1: R72.1 U2.A18 | length 131
  Top Layer w0.127: v1(86.92,155.56) 86.58,155.22 86.58,153.78 87.198,153.162 U2.A18@88.9,153.162
  Bottom Layer w0.127: v1(86.92,155.56) 86.7,155.56 86.2,156.06 83.523,156.06 82.111,157.473 82.111,157.989 81.72,158.38 81.72,159.64 82.1,160.02 84.38,160.02 84.66,159.74 85.48,159.74 86.1,160.36 86.311,160.36 87.831,161.88 88.633,161.88 89.506,161.007 94.729,161.007 95.489,161.768 97.702,163.98 118.16,163.98 121.32,160.82 121.32,159.318 120.416,158.414 120.416,157.266 119.758,156.608 119.758,153.261 121.339,151.68 121.339,146.561 123.6,144.3 123.6,96.2 124.968,94.832 R72.1@124.968,88.734
NetR74_1: R74.1 U2.B5 | length 62.3
  Top Layer w0.127: v1(84.56,135.48) 84.78,135.24 85.56,135.24 86.38,136.06 89.56,136.06 90.152,136.652 U2.B5@90.17,136.652
  Bottom Layer w0.127: R74.1@82.296,88.9 82.296,89.616 91.5,98.82 91.5,109.745 90.314,110.931 90.314,117.066 91.858,118.61 91.858,124.578 87.816,128.62 85.82,128.62 84.459,129.981 84.459,130.003 84.224,130.237 84.224,135.124 v1(84.56,135.48)
NetR74_2: R74.2 U2.C6 | length 65.3
  Top Layer w0.127: v1(90.81,137.284) 90.81,137.292 U2.C6@91.44,137.922
  Bottom Layer w0.127: R74.2@83.096,88.9 83.096,88.204 83.38,87.92 85.26,87.92 85.754,88.414 85.754,89.414 92.77,96.43 92.77,110.47 91.584,111.656 91.584,116.54 93.128,118.084 93.128,125.104 88.232,130 86.38,130 85.536,130.844 85.536,133.393 86.223,134.08 86.223,135.123 88.384,137.284 v1(90.81,137.284)
NetR74_3: R74.3 U2.D7 | length 66
  Top Layer w0.127: v1@92.08,138.562 U2.D7@92.71,139.192
  Bottom Layer w0.127: R74.3@83.896,88.9 83.896,88.324 84.02,88.2 85.14,88.2 85.5,88.56 85.5,89.52 92.516,96.536 92.516,110.365 91.33,111.551 91.33,116.645 92.874,118.189 92.874,124.998 88.132,129.74 86.26,129.74 85.264,130.736 85.264,133.48 85.962,134.178 85.962,135.243 88.579,137.86 91.42,137.86 92.08,138.52 v1(92.08,138.554)
NetR74_4: R74.4 U2.A5 | length 59.5
  Top Layer w0.127: v1(85.28,135.72) 85.64,135.72 86.572,136.652 U2.A5@88.9,136.652
  Bottom Layer w0.127: R74.4@84.696,88.9 84.696,91.636 91.754,98.694 91.754,109.85 90.568,111.036 90.568,116.961 92.112,118.505 92.112,124.683 87.895,128.9 85.92,128.9 84.775,130.045 84.48,130.341 84.48,134.56 84.5,134.56 85.28,135.34 v1(85.28,135.72)
NetR75_1: R75.1 U2.B6 | length 65.7
  Top Layer w0.127: v1(85.56,136.38) 86.54,137.36 89.6,137.36 90.162,137.922 U2.B6@90.17,137.922 ; v3(87.32,95.38) 87.94,95.38 88.5,94.82 88.5,93.68 88.86,93.32 91.9,93.32 v3(92.14,93.08)
  Bottom Layer w0.127: v1(85.56,136.38) 84.76,136.38 83.968,135.588 83.968,130.078 85.68,128.366 85.68,128.36 87.716,128.36 91.604,124.472 91.604,118.715 90.06,117.171 90.06,110.826 91.246,109.64 91.246,99.286 87.34,95.38 v3(87.32,95.38) ; v3(92.14,93.08) 93.472,91.748 R75.1@93.472,88.9
NetR75_2: R75.2 U2.C7 | length 64.9
  Top Layer w0.127: v3(89.06,93.92) 89.462,93.92 89.782,93.6 92.68,93.6 v3(93.02,93.26) ; v1(90.81,138.554) 90.81,138.562 U2.C7@91.44,139.192
  Bottom Layer w0.127: v3(89.06,93.92) 92.262,97.142 92.262,110.26 91.076,111.446 91.076,116.751 92.62,118.295 92.62,124.893 88.07,129.443 86.197,129.443 85.002,130.638 85.002,133.577 85.7,134.275 85.7,135.34 88.914,138.554 v1(90.81,138.554) ; v3(93.02,93.26) 94.272,91.988 R75.2@94.272,88.9
NetR75_3: R75.3 U2.Y2 | length 55.7
  Top Layer w0.127: U2.Y2@113.03,132.842 113.158,132.842 113.8,132.2 113.86,132.2 114.8,131.26 v1(115.1,131.26)
  Bottom Layer w0.127: R75.3@95.072,88.9 95.072,88.248 95.28,88.04 96.26,88.04 96.58,88.36 96.58,89.12 108.614,101.154 108.614,113.294 114.02,118.7 114.02,125.397 115.1,126.477 v1(115.1,131.26)
NetR75_4: R75.4 U2.W3 | length 55.4
  Top Layer w0.127: U2.W3@111.76,134.112 111.948,134.112 112.58,133.48 113.18,133.48 113.54,133.12 113.54,132.86 113.946,132.454 114.506,132.454 v1(114.88,132.08)
  Bottom Layer w0.127: R75.4@95.872,88.9 95.872,89.172 96.38,89.68 96.72,89.68 108.36,101.32 108.36,114.14 113.76,119.54 113.76,125.496 114.48,126.216 114.48,131.5 114.88,131.9 v1(114.88,132.08)
NetR76_1: R76.1 U2.W11 | length 62.4
  Top Layer w0.127: U2.W11@111.76,144.272 111.768,144.272 112.44,143.6 113.5,143.6 114.44,142.66 115.34,142.66 v1(116.32,141.68)
  Bottom Layer w0.127: v1(116.32,141.68) 117.48,141.68 121.24,137.92 121.24,96.56 119.38,94.7 R76.1@119.38,88.392
NetR76_2: R76.2 U2.Y11 | length 61.2
  Top Layer w0.127: U2.Y11@113.03,144.272 113.248,144.272 114.606,142.914 116.246,142.914 v1(116.96,142.2)
  Bottom Layer w0.127: v1(116.96,142.2) 117.32,142.2 121.5,138.02 121.5,96.48 ; R76.2@120.18,88.392 120.18,95.141 121.5,96.461
NetR76_3: R76.3 U2.V10 | length 64.1
  Top Layer w0.127: U2.V10@110.49,143.002 111.12,142.372 v1(111.12,142.37)
  Bottom Layer w0.127: v1(111.12,142.37) 115.17,142.37 115.52,142.72 117.22,142.72 121.76,138.18 121.76,96.362 120.434,95.036 120.434,90.466 120.98,89.92 R76.3@120.98,88.392
NetR78_1: R78.1 U20.5 | length 5.3
  Top Layer w0.127: U20.5@93.895,181.737 92.463,181.737 92.2,182 92.2,183.3 92.796,183.896 R78.1@94.146,183.896
NetR80_1: R80.1 SW1.2 SW1.3 | length 10.1
  Top Layer w0.127: R80.1@103.124,177.458 103.974,177.458 SW1.3@105.156,176.276 SW1.2@105.156,183.896
NetR88_5: R88.5 U2.D3 | length 55.8
  Top Layer w0.127: R88.5@84.696,90.6 84.696,91.096 85.02,91.42 89.8,91.42 v3(91.02,92.64) ; v1(92.08,133.474) 92.08,133.482 U2.D3@92.71,134.112
  Bottom Layer w0.127: v3(91.02,92.64) 91.02,92.8 94.22,96 95.04,96 95.52,96.48 95.52,101.48 94.8,102.2 94.8,110.596 93.108,112.288 93.108,115.328 93.32,115.54 94.08,115.54 94.08,115.56 94.906,116.386 94.906,117.086 94.906,123.327 95.92,124.341 95.92,125.02 95.52,125.42 95.46,125.42 95.16,125.72 95.16,126.62 93.206,128.574 93.206,129.574 92.08,130.7 v1(92.08,133.474)
NetR88_6: R88.6 U2.C5 | length 62.4
  Top Layer w0.127: R88.6@83.896,90.6 83.896,91.216 84.62,91.94 v3(89.12,91.94) ; v1(90.81,136.014) 90.81,136.022 U2.C5@91.44,136.652
  Bottom Layer w0.127: v3(89.12,91.94) 89.96,91.94 90.42,92.4 90.42,92.981 93.278,95.839 93.278,110.681 92.092,111.867 92.092,116.33 93.636,117.874 93.636,125.314 88.43,130.52 86.6,130.52 86.06,131.06 86.06,133.198 86.74,133.878 86.74,134.897 87.417,135.574 87.417,135.577 87.854,136.014 v1(90.81,136.014)
NetR88_7: R88.7 U2.D6 | length 64.6
  Top Layer w0.127: R88.7@83.096,90.6 83.096,91.236 84.5,92.64 v3(89.72,92.64) ; v1@92.08,137.292 U2.D6@92.71,137.922
  Bottom Layer w0.127: v3(89.72,92.64) 93.024,95.944 93.024,110.576 91.838,111.762 91.838,116.435 93.382,117.979 93.382,125.209 88.331,130.26 86.5,130.26 85.8,130.96 85.8,133.298 86.48,133.978 86.48,135 88.1,136.62 91.36,136.62 92.024,137.284 v1(92.08,137.284)
NetR88_8: R88.8 U2.A4 | length 59.3
  Top Layer w0.127: R88.8@82.296,90.6 82.296,91.336 85.06,94.1 v3(87.94,94.1) ; v1(85.08,134.32) 86.142,135.382 U2.A4@88.9,135.382
  Bottom Layer w0.127: v1(85.08,134.32) 84.739,133.979 84.739,130.441 86.02,129.16 87.994,129.16 92.366,124.788 92.366,118.4 90.822,116.856 90.822,111.226 92.008,110.04 92.008,98.168 v3(87.94,94.1)
NetR89_5: R89.5 U2.V4 | length 58.9
  Top Layer w0.127: R89.5@95.872,90.6 95.872,91.452 96.48,92.06 v3(101.1,92.06) ; U2.V4@110.49,135.382 111.12,134.752 v1(111.12,134.75)
  Bottom Layer w0.127: v3(101.1,92.06) 101.1,93.1 108.868,100.868 108.868,112.994 114.28,118.406 114.28,125.298 115.672,126.69 115.672,132.048 114.48,133.24 112.98,133.24 111.47,134.75 v1(111.12,134.75)
NetR89_6: R89.6 U2.T6 | length 92.8
  Top Layer w0.127: R89.6@95.072,90.6 95.072,91.658 96.154,92.74 101.42,92.74 102,92.16 110.84,92.16 113.82,95.14 v3(121.32,95.14) ; U2.T6@107.95,137.922 107.95,137.93 v1@108.6,138.58
  Bottom Layer w0.127: v1(108.58,138.56) 109.26,139.24 109.26,142.62 109.7,143.06 117.24,143.06 121.136,139.164 122.02,138.28 122.02,95.84 v3(121.32,95.14)
NetR89_7: R89.7 U2.V5 | length 63.3
  Top Layer w0.127: R89.7@94.272,90.6 94.272,91.292 96.006,93.026 101.574,93.026 101.86,92.74 v3(102.74,92.74) ; U2.V5@110.49,136.652 111.12,136.022 v1(111.12,136.02)
  Bottom Layer w0.127: v3(102.74,92.74) 109.376,99.376 109.376,112.614 114.8,118.038 114.8,125.099 116.18,126.479 116.18,133.46 115.626,134.014 113.206,134.014 111.2,136.02 v1(111.12,136.02)
NetR89_8: R89.8 U2.Y3 | length 59
  Top Layer w0.127: R89.8@93.472,90.6 93.472,91.072 95.68,93.28 v3(102.06,93.28) ; U2.Y3@113.03,134.112 113.794,133.348 113.794,132.965 114.051,132.708 115.528,132.708 v1(115.64,132.82)
  Bottom Layer w0.127: v3(102.06,93.28) 101.86,93.4 109.122,100.662 109.122,112.842 114.534,118.254 114.534,118.454 114.54,118.46 114.54,125.198 115.926,126.584 115.926,132.374 115.64,132.66 v1(115.64,132.82)
NetR90_1: R90.1 U2.V11 | length 60.3
  Top Layer w0.127: U2.V11@110.49,144.28 U2.V11@110.49,144.272 111.12,143.642 v1(111.12,143.64)
  Bottom Layer w0.127: v1(111.12,143.64) 111.446,143.314 117.346,143.314 121.589,139.071 122.28,138.38 122.28,93.88 121.92,93.52 R90.1@121.92,92.456
NetR90_2: R90.2 U2.W10 | length 59
  Top Layer w0.127: U2.W10@111.76,143.002 111.76,142.98 112.42,142.32 113.32,142.32 114.58,141.06 v3(120.4,141.06)
  Bottom Layer w0.127: v3(120.4,141.06) 120.4,140.619 122.54,138.479 122.54,93.94 122.72,93.76 R90.2@122.72,92.456
NetR91_2: R91.2 U2.G18 | length 60.5
  Top Layer w0.127: v1(95.88,153.8) 96.518,153.162 U2.G18@96.52,153.162 ; v3(119.24,143.92) 119.24,143.56 120.02,142.78 126.16,142.78 130.256,138.684 R91.2@130.722,138.684
  Bottom Layer w0.127: v1(95.88,153.8) 95.88,154.004 96.642,154.766 96.642,159.102 97.56,160.02 98.962,160.02 100.482,161.54 115.7,161.54 118.62,158.62 118.62,158 117.98,157.36 117.98,151.64 119.766,149.854 119.766,144.446 v3(119.24,143.92)
NetR92_2: R92.2 U2.F20 | length 93.3
  Top Layer w0.127: v1(94.94,158.28) 95.25,157.97 U2.F20@95.25,155.702 ; v3(122.8,141.28) 126.52,141.28 131.5,136.3 131.5,134.8 134.08,132.22 140.22,132.22 141.72,130.72 141.72,114.82 141.2,114.3 R92.2@140.882,114.3
  Bottom Layer w0.127: v1(94.94,158.28) 94.94,158.58 95.24,158.88 95.24,159.68 98.5,162.94 116.96,162.94 119.98,159.92 119.98,159.14 119.654,158.814 119.654,157.597 118.996,156.939 118.996,152.061 119.912,151.144 120.831,150.226 120.831,145.486 121.524,144.793 121.524,143.356 122.8,142.08 v3(122.8,141.28)
NetR102_2: R102.2 U2.D15 U22.14 | length 65.6
  Top Layer w0.127: R102.2@45.378,159.512 43.94,158.074 43.94,157.94 44.078,157.802 55.305,157.802 59.203,161.7 85.7,161.7 87.22,160.18 87.22,157.5 84.94,155.22 84.94,153.06 v1(84.7,152.82) ; v1@92.072,149.99 U2.D15@92.71,149.352
  Bottom Layer w0.127: v1(84.7,152.82) 85,152.82 86.96,150.86 88.079,150.86 88.299,150.64 91.4,150.64 v1(92.06,149.98)
NetR103_2: R103.2 U2.E16 U22.6 | length 65
  Top Layer w0.127: U22.6@45.212,152.602 50.824,152.602 58.892,160.67 59.402,161.18 85.14,161.18 85.994,160.326 85.994,159.72 86.295,159.419 86.295,156.955 86.101,156.761 84.14,154.8 v1(84.14,154.42) ; v1(93.34,151.26) 93.342,151.26 U2.E16@93.98,150.622
  Bottom Layer w0.127: R103.2@45.212,152.402 45.412,152.602 v3(46.82,152.602) ; v1(84.14,154.42) 84.918,154.42 86.158,153.18 91.04,153.18 91.44,152.78 91.44,152.24 91.72,151.96 92.32,151.96 93.02,151.26 v1(93.34,151.26)
NetR106_1: R106.1 U2.F19 U22.13 | length 60.6
  Top Layer w0.127: U22.13@45.212,157.152 55.014,157.152 58.677,160.815 59.302,161.44 85.26,161.44 86.58,160.12 v1(86.58,159.92) ; v1(93.3,160) 95.38,160 95.9,159.48 95.9,155.08 95.252,154.432 U2.F19@95.25,154.432
  Bottom Layer w0.127: R106.1@45.212,157.352 46.46,157.352 v3(46.66,157.152) ; v1(86.58,159.92) 90.04,159.92 90.42,160.3 93,160.3 v1(93.3,160)
NetR115_1: R115.1 R128.2 U26.2 | length 6.7
  Top Layer w0.25: R115.1@20.154,174.752 22.518,174.752 R128.2@23.534,173.736 23.38,173.582 U26.2@23.38,170.89
NetR116_1: R116.1 R119.1 U26.6 | length 4.5
  Top Layer w0.2: R116.1@21.678,162.052 R116.1@22.01,162.384 ; R119.1@22.11,163.476 R119.1@22.186,163.4
  Top Layer w0.25: R116.1@21.678,162.052 21.678,163.244 R119.1@22.11,163.676 ; R119.1@22.01,163.576 R119.1@22.11,163.676 ; U26.6@22.11,165.69 R119.1@22.11,163.676
NetR142_2: R142.2 S2.2 | length 5.3
  Top Layer w0.127: S2.2@150.495,109.673 150.495,110.955 150.88,111.34 153.494,111.34 R142.2@154.09,110.744
NetR143_1: R143.1 S2.3 | length 5.4
  Top Layer w0.127: R143.1@145.63,110.744 146.366,111.48 148.7,111.48 149.225,110.955 S2.3@149.225,109.673
NetR144_1: R144.1 S2.4 | length 4.6
  Top Layer w0.127: R144.1@145.63,109.22 145.63,109.31 147.5,111.18 147.8,111.18 147.955,111.025 S2.4@147.955,109.673
NetR147_2: R147.2 U30.12 | length 2.6
  Top Layer w0.127: R147.2@135.94,107.58 135.978,106.522 136.442,106.058 U30.12@136.442,105.192
NetR148_2: R148.2 U30.37 | length 2.3
  Top Layer w0.127: U30.37@143.292,98.342 144.648,98.342 R148.2@145.288,97.702
NetR149_2: R149.2 U30.24 | length 32.5
  Top Layer w0.127: U30.24@135.092,98.342 136.082,98.342 136.546,98.806 138.066,98.806 v3(138.94,99.68) ; v3(152.02,104.5) 152.46,104.5 154.08,106.12 156.44,106.12 157.3,105.26 159.14,105.26 159.544,105.664 R149.2@162.726,105.664
  Bottom Layer w0.127: v3(138.94,99.68) 140.1,99.68 141.42,98.36 144.66,98.36 150.8,104.5 v3(152.02,104.5)
NetR153_1: R153.1 R154.2 U2.G17 U31.2 | length 54.1
  Top Layer w0.127: v1(95.88,152.53) 96.518,151.892 U2.G17@96.52,151.892 ; v3(118.08,158.3) 119.481,158.3 120.541,159.36 123.88,159.36 124.68,160.16 133.578,160.16 R153.1@134.112,160.694 135.46,160.694 R154.2@135.636,160.87 135.636,160.876 136.98,162.22 138.36,162.22 138.562,162.018 U31.2@138.562,161.594 ; 138.32,161.76 U31.2@138.562,161.518
  Bottom Layer w0.127: v1(95.88,152.53) 95.89,152.53 96.56,153.2 96.56,154.29 96.896,154.626 96.896,158.956 97.7,159.76 99.061,159.76 100.581,161.28 115.1,161.28 v3(118.08,158.3)
NetR155_2: R155.2 U33.9 | length 7.5
  Top Layer w0.127: U33.9@50.78,112.287 50.78,109.743 51.762,108.761 51.762,105.379 R155.2@51.646,105.263
NetR156_1: R156.1 U2.A17 U33.11 | length 83.1
  Top Layer w0.127: U33.11@51.78,112.287 51.78,111.243 52.016,111.007 52.016,109.427 52.302,109.141 52.302,107.281 53.17,106.413 R156.1@53.17,105.263 58.343,105.263 60.72,107.64 65.72,107.64 65.9,107.46 67.44,107.46 69.34,109.36 v1(69.34,111.62) ; v3(78.02,133.88) 80.863,133.88 83.84,136.857 83.84,138.782 84.76,139.702 84.76,142.879 85.086,143.205 85.086,143.654 84.6,144.14 84.6,144.74 84.92,145.06 v1(85.32,145.06) ; v1(83.36,147.94) 83.38,147.94 84.52,149.08 84.52,151.86 84.98,152.32 85.78,152.32 86.208,151.892 U2.A17@88.9,151.892
  Bottom Layer w0.127: v1(69.34,111.62) 69.34,111.7 71.846,114.206 71.846,125.626 78.02,131.8 v3(78.02,133.88) ; v1(83.36,147.94) 83.36,147.28 85.32,145.32 v1(85.32,145.06)
NetR157_1: R157.1 U33.16 | length 2
  Top Layer w0.127: U33.16@54.28,112.287 54.28,111.063 54.834,110.509 R157.1@54.86,110.509
NetR158_1: R158.1 U33.19 U33.20 | length 5.7
  Top Layer w0.127: U33.19@56.13,115.137 57.926,115.137 ; U33.20@56.13,115.637 57.426,115.637 58.928,114.134 R158.1@59.436,114.134
NetR159_1: R159.1 U33.62 | length 2.3
  Top Layer w0.127: R159.1@42.672,113.45 42.672,113.691 44.118,115.137
NetR160_2: R160.2 U33.29 | length 3.9
  Top Layer w0.127: U33.29@56.13,120.137 57.123,120.137 57.86,119.4 58.742,119.4 R160.2@59.436,118.706
NetR163_1: R163.1 R164.2 U34.3 | length 10.8
  Bottom Layer w0.4: R163.1@35.394,168.148 35.394,168.354 37.6,170.56 38.86,170.56 39.878,171.578 39.878,176.188 R164.2@39.79,176.276
NetR164_1: R164.1 R165.2 U34.5 | length 9.8
  Bottom Layer w0.4: R164.1@41.49,176.276 41.49,175.61 42.418,174.682 42.418,171.862 42.742,171.538 R165.2@47.244,171.538
NetR165_1: R165.1 R166.2 U34.10 | length 9.6
  Bottom Layer w0.4: R166.2@43.014,165.1 42.418,165.696 42.418,169.518 42.738,169.838 R165.1@47.244,169.838
NetR166_1: R166.1 R167.2 U34.12 | length 5.2
  Bottom Layer w0.4: R167.2@39.458,165.1 39.878,165.52 U34.12@39.878,168.063 ; 39.878,166.536 R166.1@41.314,165.1
NetR168_2: R168.2 U35.8 | length 3.2
  Bottom Layer w0.4: U35.8@41.208,178.435 43.649,178.435 R168.2@44.196,178.982
NetR169_2: R169.2 R170.CCW U35.5 | length 16.7
  Bottom Layer w0.4: R170.CCW@32.48,175.634 33.306,175.634 33.96,174.98 37.08,174.98 37.62,175.52 37.62,176.9 39.458,178.738 R169.2@39.458,183.896 ; 39.458,182.722 39.935,182.245 U35.5@41.208,182.245
NetU2_D18: U2.D18 U22.3 | length 56.2
  Top Layer w0.127: U22.3@45.212,150.652 49.592,150.652 59.6,160.66 77.92,160.66 78.58,160 79.76,160 80.42,160.66 83.32,160.66 85.36,158.62 85.36,157.4 v1(85.66,157.1) ; v1(92.07,153.8) 92.072,153.8 U2.D18@92.71,153.162
  Bottom Layer w0.127: v1(85.66,157.1) 86.48,157.06 88.1,157.06 90.24,154.92 91.24,154.92 92.07,154.09 v1(92.07,153.8)
NetU2_G19: U2.G19 U33.12 | length 105.9
  Top Layer w0.127: U33.12@52.28,112.287 52.28,109.523 52.562,109.241 52.562,107.421 54.162,105.821 58.281,105.821 60.64,108.18 62.08,108.18 62.34,108.44 65.88,108.44 66.2,108.76 67.78,108.76 68.76,109.74 v1(68.76,110.86) ; v3(77.1,134.5) 77.314,134.714 80.979,134.714 83.32,137.055 83.32,138.98 83.89,139.55 83.89,143.87 83.94,143.92 v1(83.94,144.22) v1@83.98,144.18 ; v1(82.22,149.08) 82.56,149.42 82.56,155.42 83.586,156.446 83.586,158.274 83.2,158.66 83,158.66 82.3,159.36 v1(82.3,159.46) ; v1(91.66,159.68) 91.66,160.02 92.68,161.04 95.14,161.04 97.12,159.06 97.12,155.02 96.532,154.432 U2.G19@96.52,154.432
  Bottom Layer w0.127: v1(68.76,110.86) 68.76,111.86 71.592,114.692 71.592,125.752 77.1,131.26 v3(77.1,134.5) ; v1(82.22,149.08) 82.22,148.118 82.44,147.898 82.44,147.278 83.32,146.398 83.482,146.398 84.54,145.34 84.54,144.86 83.98,144.3 v1(83.94,144.22) ; v1@82.32,159.46 82.62,159.76 84.1,159.76 84.58,159.28 91.26,159.28 v1(91.66,159.68)
NetU2_G20: U2.G20 U33.13 | length 101.2
  Top Layer w0.127: U33.13@52.78,112.287 52.78,111.003 54.642,109.141 54.642,106.522 55.023,106.14 58.22,106.14 61.48,109.4 62.12,109.4 62.28,109.24 67.32,109.24 67.86,109.78 v1(67.86,111.54) ; v3(76.34,133.94) 77.28,133.94 77.8,134.46 81.084,134.46 83.58,136.956 83.58,138.881 84.36,139.661 84.36,143.4 v1(84.42,143.46) ; v1(82.78,148.52) 83.5,149.24 83.5,155.1 83.84,155.44 83.84,158.62 v1(83.22,159.24) ; v1(92.54,159.2) 92.54,160.26 92.96,160.68 95.14,160.68 96.52,159.3 U2.G20@96.52,155.702
  Bottom Layer w0.127: v1@67.86,111.56 71.338,115.038 71.338,125.938 76.34,130.94 v3(76.34,133.94) ; v1(82.78,148.52) 82.78,147.46 84.8,145.44 84.8,144.761 84.5,144.461 84.5,143.54 v1(84.42,143.46) ; v1(83.22,159.24) 83.551,158.909 89.151,158.909 89.38,158.68 92.02,158.68 v1(92.54,159.2)
NetU2_U17: U2.U17 U12.3 | length 85.4
  Top Layer w0.127: U2.U17@109.22,151.892 109.22,151.9 v1(109.85,152.53) ; v1(117.12,156.3) 118.7,156.3 120.1,157.7 124.34,157.7 v3(124.14,157.78)
  Bottom Layer w0.127: U12.3@67.475,168.59 68.97,168.59 69.44,169.06 70.62,169.06 71.58,168.1 ; 71.581,168.1 71.801,167.88 90.24,167.88 91.1,168.74 114.72,168.74 116.419,167.041 121.499,167.041 124.88,163.66 124.88,160.76 123.96,159.84 123.96,157.96 v3(124.14,157.78) ; v1(109.85,152.53) 109.85,152.55 111.52,154.22 116.36,154.22 117.12,154.98 v1(117.12,156.3)